# Allegro board MY_TEST730.brd
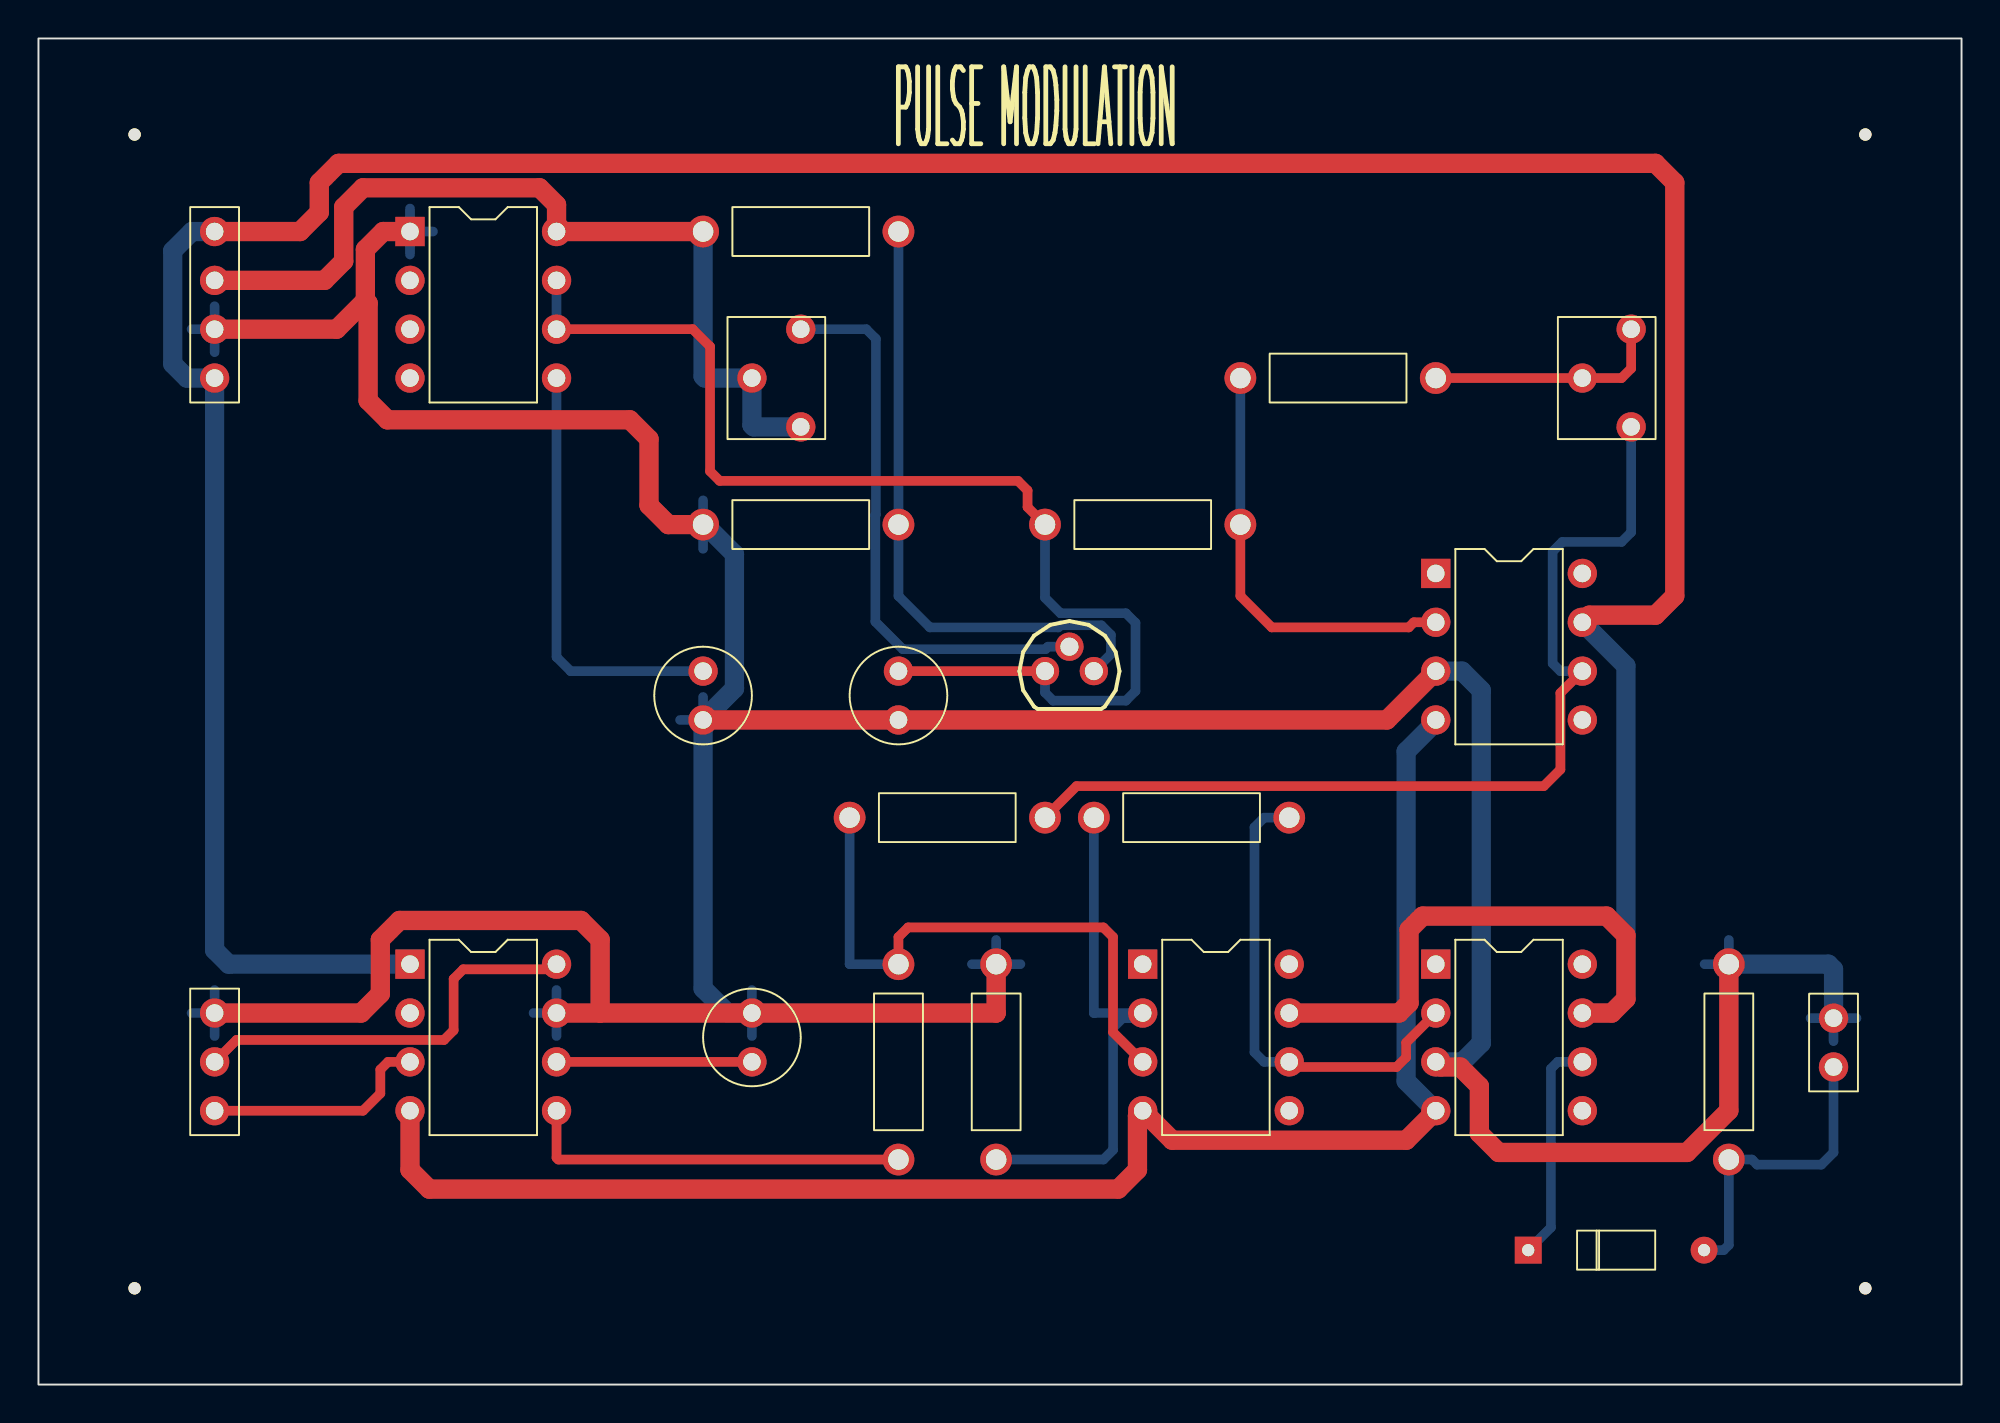
[diagram p0: board, top side]
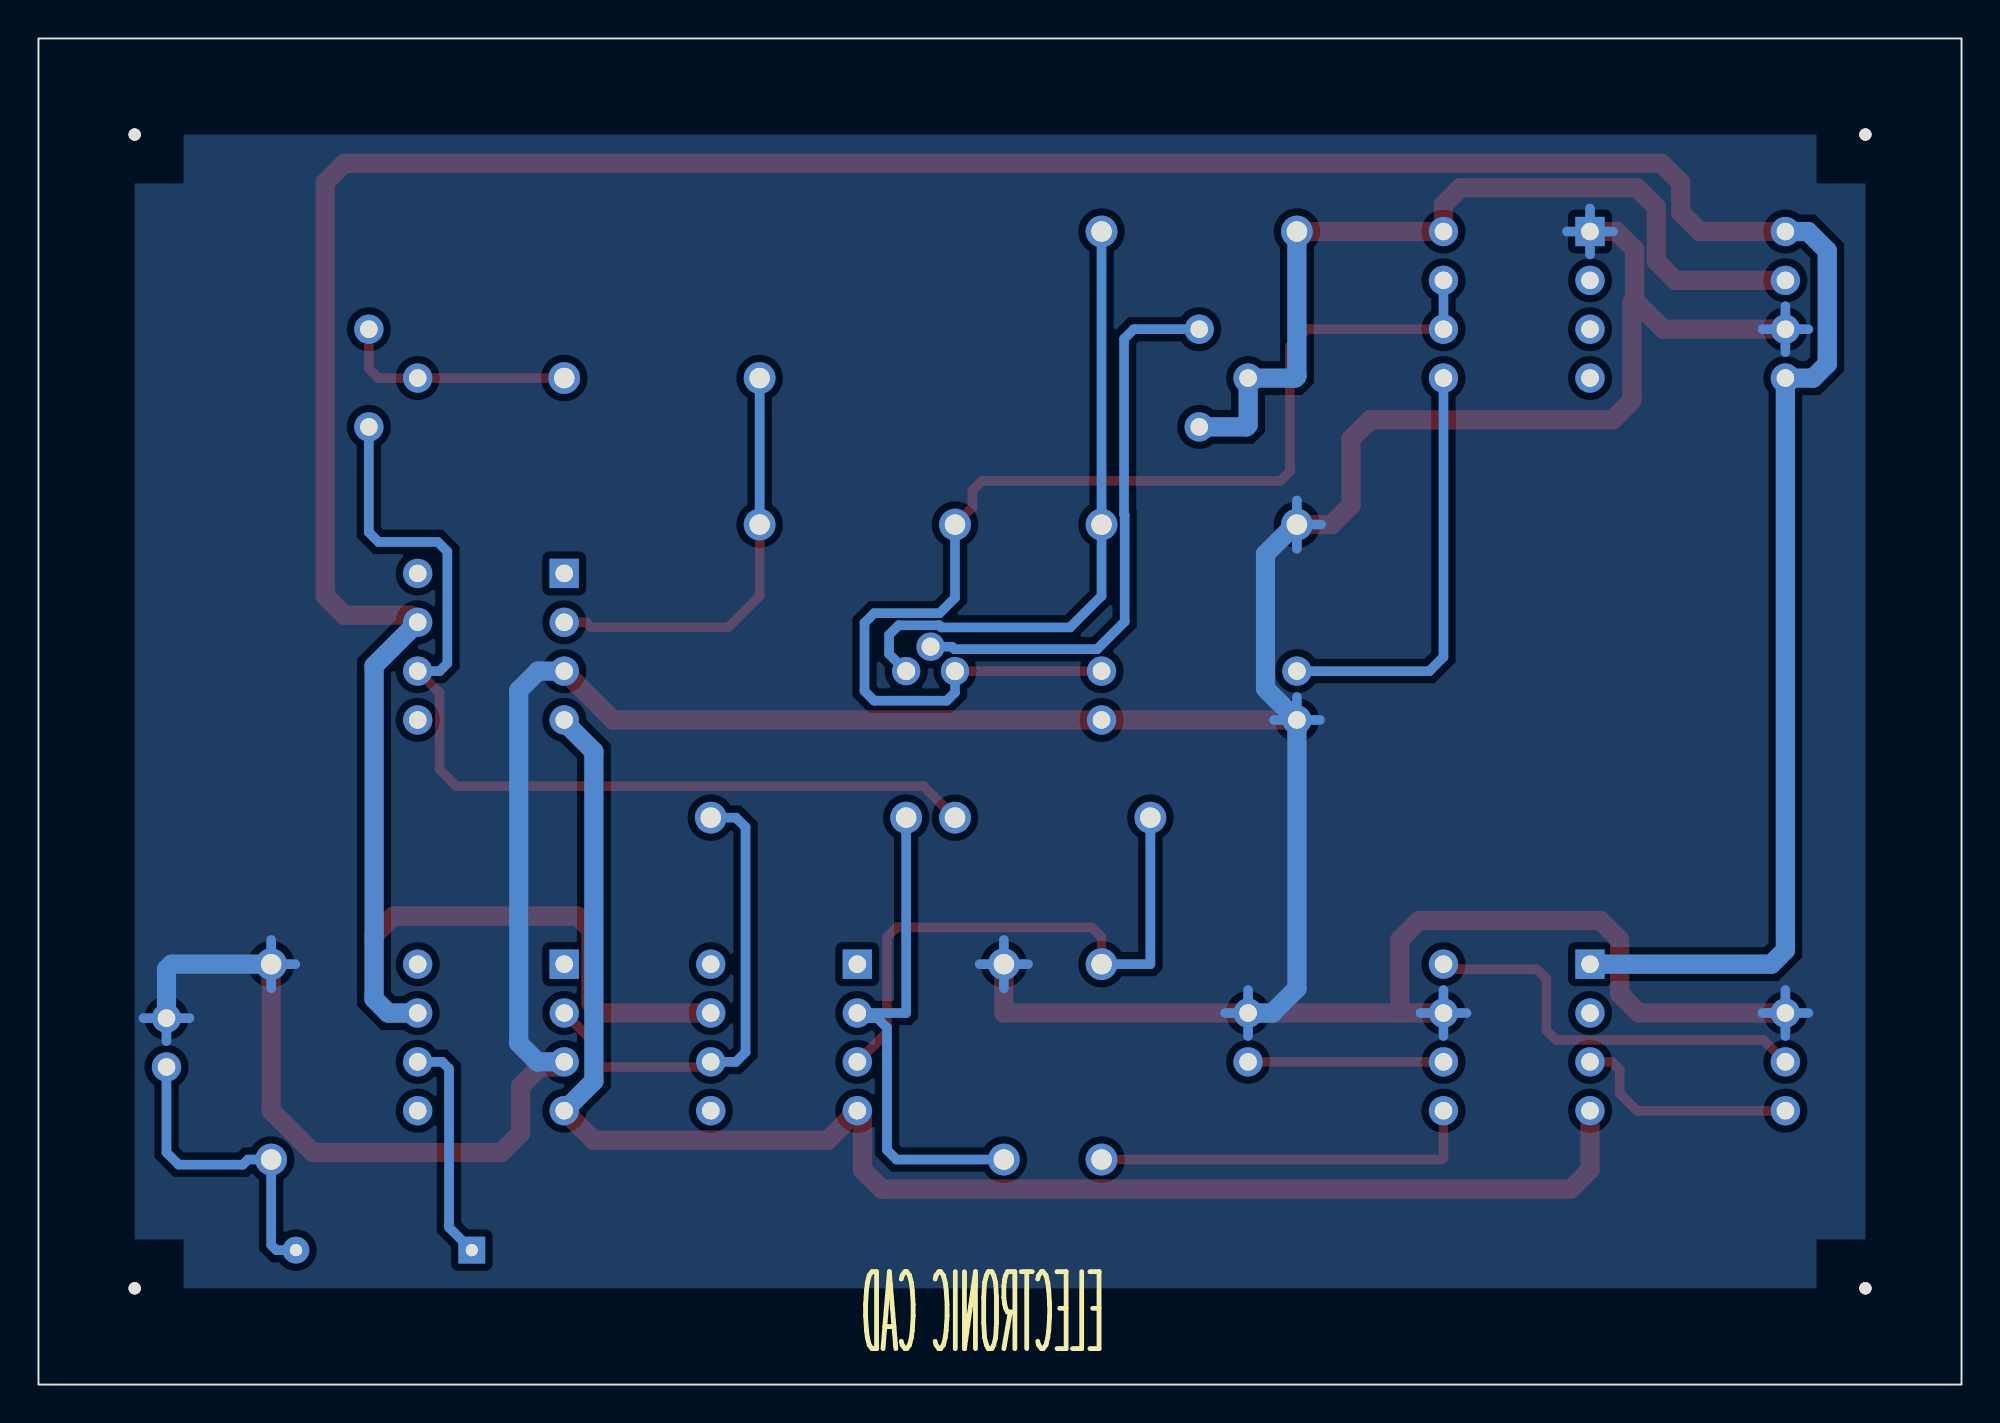
[diagram p1: board, bottom side, seen from below]

Outline 100 x 70 mm; copper layers: TOP, BOTTOM. Coordinates in mm from the lower left corner of the outline.
Outline path: rectangle 0,0 100,70

## Design rules (mm)
constraint set DEFAULT: min track width 0.5, pair gap 0.5
net group POWERNETS: nets +5V +15V -15V

## Placement (name value [footprint] x y rotation side)
C1  0.01uF  [CAP196]  44.72 34.56 0 top
C2  0.01uF  [CAP196]  34.56 34.56 0 top
C3  1n  [CAP196]  37.1 16.78 0 top
D1  1S1588  [DO35]  77.47 6.99 270 top
J1  CON4  [JUMPER4]  9.16 59.96 270 top
J2  CON3  [JUMPER3]  9.16 14.24 90 top
J3  CON2  [JUMPER2]  93.34 16.51 90 top
NOREF  -  []  0 70 0 top
NOREF#2  -  [unnamed#2]  95 65 0 top
NOREF#3  -  []  100 0 90 top
NOREF#4  -  [unnamed#2]  5 5 0 top
NOREF#5  -  [unnamed#2]  95 5 0 top
NOREF#6  -  [unnamed#2]  5 65 0 top
Q1  2SA1015  [TO226AB]  52.34 37.1 0 top
R1  560  [RES400]  62.5 52.34 270 top
R2  39K  [RES400]  34.56 59.96 270 top
R3  6.2K  [RES400]  52.34 44.72 270 top
R4  100K  [RES400]  44.72 44.72 90 top
R5  10K  [RES400]  52.34 29.48 90 top
R6  10K  [RES400]  54.88 29.48 270 top
R7  10K  [RES400]  44.72 11.7 0 top
R8  10K  [RES400]  49.8 11.7 0 top
R9  10K  [RES400]  87.9 11.7 0 top
U1  NE555  [DIP8_3]  19.32 59.96 0 top
U2  LF356  [DIP8_3]  72.66 42.18 0 top
U3  LF398  [DIP8_3]  19.32 21.86 0 top
U4  LF356  [DIP8_3]  57.42 21.86 0 top
U5  LF356  [DIP8_3]  72.66 21.86 0 top
VR1  5K  [RESADJ]  39.64 54.88 0 top
VR2  20K  [RESADJ]  82.82 54.88 0 top

## Library data of the parts
C1-C3 = C: Tolerance: ***; User Part Number: ***
D1 = D1S1588
J1 = CON4: User Part Number: ***
J2 = CON3_0: User Part Number: ***
J3 = CON2: User Part Number: ***
Q1 = 2SA1020
R1-R9 = R: Tolerance: ***; User Part Number: ***
U1 = NE555_2: Tolerance: ***; User Part Number: ***
U2 U4 U5 = LF356_0: Tolerance: ***; User Part Number: ***
U3 = LF111/TO_1: Tolerance: ***; User Part Number: ***
VR1 VR2 = RESISTOR VAR: Tolerance: ***; User Part Number: ***

## Footprints (pads in the part's own frame, mm; a bottom-side part is the same pattern mirrored in y, then rotated)
CAP196
  round 1.524 hole 0.914: 1(0,0) 2(0,2.54)
DIP8_3
  rect 1.524x1.524 hole 0.914: 1(0,0)
  round 1.524 hole 0.914: 2(0,-2.54) 3(0,-5.08) 4(0,-7.62) 5(7.62,-7.62) 6(7.62,-5.08) 7(7.62,-2.54) 8(7.62,0)
DO35
  rect 1.397x1.397 hole 0.635: 1(0,0)
  round 1.397 hole 0.635: 2(0,9.144)
JUMPER2
  round 1.524 hole 0.914: 1(0,0) 2(2.54,0)
JUMPER3
  round 1.524 hole 0.914: 1(0,0) 2(2.54,0) 3(5.08,0)
JUMPER4
  round 1.524 hole 0.914: 1(0,0) 2(2.54,0) 3(5.08,0) 4(7.62,0)
RES400
  round 1.651 hole 1.067: 1(0,0) 2(0,10.16)
RESADJ
  round 1.524 hole 0.914: 1(0,0) 2(-2.54,-2.54) 3(0,-5.08)
TO226AB
  round 1.473 hole 0.94: 1(0,0) 2(1.27,1.27) 3(2.54,0)
unnamed#2
  round 0.635 hole 3.175 unplated: (0,0)

## Nets
+5V: J1.2 R2.1 U1.8(VCC) VR1.2(WIPER) VR1.3
+15V: J1.1 J1.4 U2.7 U3.1 U4.7 U5.7
-15V: U2.4(V-) U3.4(V-) U4.4(V-) U5.4(V-)
GND: C1.1 C2.1 C3.2 J1.3 J2.3 J3.2 R4.2 R8.2 R9.2 U1.1 U2.3 U3.7 U5.3
CLOCK: U1.2
SIG_1: R5.1 U2.6 VR2.3
N03546: Q1.3 R2.2 R4.1
N03806: C1.2 Q1.1(E) R3.1 U1.6 U1.7
N03941: C2.2 U1.5
N04168: R1.1 R3.2 U2.2
N04289: R1.2 VR2.1 VR2.2(WIPER)
N04781: J2.1 U3.3
N04785: J2.2 U3.8
N04916: C3.1 U3.6
N05102: R7.1 U3.5
N05192: R5.2 R7.2 U4.3
N05496: R6.1 R8.1 U4.2
N05556: R6.2 U4.6 U5.2
N05860: D1.1 U5.6
N05951: D1.2 J3.1 R9.1
N014830: Q1.2 VR1.1

Pads without a net: U1 3 4; U2 1 5 8; U3 2; U4 1 5 8; U5 1 5 8

## Via types
v1: diameter 0.61, hole 0.33, TOP to BOTTOM, 6 vias

## Routing (per net, layer and track width the routed paths; a pad name or vN(x,y) marks a point on that pad's centre or on a via; arc(x,y) is an arc through that point)
+5V: length 45.9
  TOP w1: R2.1 U1.8 26.94,61.35 26.06,62.23 16.87,62.23 15.87,61.23 15.87,58.42 14.87,57.42 J1.2
  BOTTOM w1: R2.1 34.56,52.44 34.66,52.34 VR1.2 37.1,49.9 37.2,49.8 VR1.3
+15V: length 208
  TOP w1: U5.7 81.81,19.32 82.55,20.05 82.55,23.36 81.55,24.36 71.98,24.36 71.27,23.65 71.27,19.84 70.75,19.32 U4.7 ; U2.7 80.65,40.01 84.09,40.01 85.09,41.01 85.09,62.5 84.09,63.5 15.6,63.5 14.6,62.5 14.6,60.96 13.6,59.96 v1(9.26,59.96)
  BOTTOM w1: v1(9.26,59.96) v1(9.16,59.96) 7.98,59.96 6.98,58.96 6.98,53.07 7.72,52.34 J1.4 9.16,22.59 9.89,21.86 U3.1 ; U2.7 82.55,37.37 82.55,20.05 81.81,19.32 U5.7
-15V: length 83.2
  TOP w1: U3.4 19.32,11.16 20.32,10.16 56.15,10.16 57.15,11.16 57.15,13.97 U4.4 58.96,12.7 71.12,12.7 U5.4 ; U2.4 v1(72.76,34.56)
  BOTTOM w1: U5.4 71.12,15.78 71.12,32.92 v1(72.76,34.56)
GND: length 264
  TOP w1: U1.1 17.93,59.96 17,59.03 17,56.38 ; 29.21,19.32 29.21,23.13 28.21,24.13 18.78,24.13 17.78,23.13 17.78,20.32 16.78,19.32 J2.3 ; 29.21,19.32 C3.2 49.79,19.32 49.8,19.33 R8.2 ; 29.21,19.32 U3.7 ; 17,56.38 17.14,56.23 17.14,51.17 18.14,50.17 30.75,50.17 31.75,49.17 31.75,45.72 32.75,44.72 v1(34.56,44.72) v1(34.66,44.72) ; 17,56.38 15.5,54.88 J1.3 ; U5.3 72.93,16.51 73.93,16.51 74.93,15.51 74.93,13.07 75.93,12.07 85.72,12.07 87.9,14.25 R9.2 v1(88,21.86) ; C2.1 C1.1 70.12,34.56 U2.3
  BOTTOM w0.5: R8.2 51.06,21.86 ; R8.2 48.54,21.86 ; R8.2 49.8,23.12 ; R8.2 49.8,20.6 ; 9.16,18.12 J2.3 ; J2.3 7.96,19.32 ; J2.3 9.16,20.52 ; J2.3 10.36,19.32 ; 87.9,20.6 R9.2 ; R9.2 86.64,21.86 ; R9.2 87.9,23.12 ; 93.34,17.86 J3.2 ; J3.2 92.15,19.05 ; J3.2 94.54,19.05 ; 25.74,19.32 U3.7 ; U3.7 26.94,20.52 ; U3.7 28.14,19.32 ; U3.7 26.94,18.12 ; 9.16,53.68 J1.3 ; J1.3 10.36,54.88 ; J1.3 9.16,56.08 ; J1.3 7.96,54.88 ; C2.1 35.76,34.56 ; C2.1 34.56,35.76 ; C2.1 33.36,34.56 ; U1.1 19.32,61.16 ; U1.1 20.52,59.96 ; U1.1 18.12,59.96 ; U1.1 19.32,58.76 ; 33.3,44.72 v1(34.56,44.72) ; v1(34.56,44.72) 34.56,43.46 ; v1(34.56,44.72) 34.56,45.98 ; C3.2 38.3,19.32 ; C3.2 37.1,18.12 ; C3.2 37.1,20.52
  BOTTOM w1: U5.3 74.05,16.78 75.03,17.76 75.03,36.1 74.03,37.1 U2.3 ; v1(34.66,44.72) 36.19,43.18 36.19,36.19 C2.1 34.56,20.6 35.84,19.32 C3.2 ; J3.2 93.34,21.59 93.08,21.86 v1(88,21.86) R9.2
SIG_1: length 50.9
  TOP w0.5: R5.1 53.98,31.12 78.27,31.12 79.14,31.99 79.14,35.96 U2.6
  BOTTOM w0.5: U2.6 79.14,37.1 78.74,37.5 78.74,43.32 79.24,43.82 82.32,43.82 82.82,44.32 VR2.3
N03546: length 33.2
  BOTTOM w0.5: Q1.3 55.77,37.99 55.77,38.98 55.27,39.48 53.15,39.48 53.04,39.37 46.35,39.37 44.72,41.01 R4.1 R2.2
N03806: length 62.9
  TOP w0.5: Q1.1 C1.2 ; U1.6 34.02,54.88 34.92,53.98 34.92,47.49 35.42,46.99 50.93,46.99 51.43,46.49 51.43,45.63 R3.1
  BOTTOM w0.5: U1.7 U1.6 ; R3.1 52.34,40.92 53.14,40.11 56.55,40.11 57.05,39.61 57.05,36.06 56.55,35.56 52.76,35.56 52.34,35.99 Q1.1
N03941: length 22.4
  BOTTOM w0.5: C2.2 27.67,37.1 26.94,37.83 U1.5
N04168: length 22.3
  TOP w0.5: U2.2 71.52,39.64 71.25,39.37 64.13,39.37 62.5,41.01 R3.2
  BOTTOM w0.5: R1.1 R3.2
N04289: length 12.4
  TOP w0.5: R1.2 VR2.2 82.32,52.34 82.82,52.84 VR2.1
N04781: length 11.9
  TOP w0.5: U3.3 18.18,16.78 17.78,16.38 17.78,15.14 16.88,14.24 J2.1
N04785: length 21.5
  TOP w0.5: U3.8 26.67,21.59 22.09,21.59 21.59,21.09 21.59,18.42 21.09,17.92 10.3,17.92 J2.2
N04916: length 10.2
  TOP w0.5: C3.1 U3.6
N05102: length 20.3
  TOP w0.5: R7.1 27.04,11.7 26.94,11.8 U3.5
N05192: length 30.3
  TOP w0.5: R7.2 44.72,23.27 45.22,23.77 55.38,23.77 55.88,23.27 55.88,18.32 U4.3
  BOTTOM w0.5: R5.2 42.18,21.87 42.19,21.86 R7.2
N05496: length 27.2
  BOTTOM w0.5: R8.1 55.38,11.7 55.88,12.2 55.88,18.55 56.38,19.05 57.15,19.05 U4.2 54.89,19.32 54.88,19.33 R6.1
N05556: length 25.1
  TOP w0.5: U5.2 71.12,17.78 71.12,17.01 70.62,16.51 65.31,16.51 U4.6
  BOTTOM w0.5: U4.6 63.73,16.78 63.23,17.28 63.23,28.98 63.73,29.48 R6.2
N05860: length 11.7
  BOTTOM w0.5: D1.1 78.65,8.17 78.65,16.43 79,16.78 U5.6
N05951: length 16.1
  BOTTOM w0.5: J3.1 93.34,12.07 92.71,11.43 89.37,11.43 89.1,11.7 R9.1 87.9,7.26 87.63,6.99 86.61,6.99
N014830: length 29.6
  BOTTOM w0.5: Q1.2 52.5,38.37 52.36,38.24 44.95,38.24 43.52,39.67 43.52,45.22 43.55,45.25 43.55,54.38 43.05,54.88 VR1.1

## Copper pours and planes (outline as drawn; the poured copper is in the pictures)
GND on BOTTOM: 95,5 95,65 5,65 5,5

## Text on the board
Ref Des/Silkscreen Bottom: ELECTRONIC CAD
Ref Des/Silkscreen Top: PULSE MODULATION
DIMENSION: FIGURE | FINISHED_SIZE | 0.33 | 0.635 | 0.914 | 0.94 | 1.067 | 3.175 | DRILL CHART: TOP to BOTTOM | ALL UNITS ARE IN MILLIMETERS | PLATED | NON-PLATED | QTY | 25 | 2 | 61 | 3 | 18 | 4
